# Altium PCB PID _v2.PcbDoc
Units mil, origin at the board's own origin, x right, y up, seen from the top; angles counter-clockwise.
Board outline 3937.01 x 3937.01 mil, 2 copper layers (Top Layer, Bottom Layer); 59 components, 49 nets, 208 pads, 4 vias.
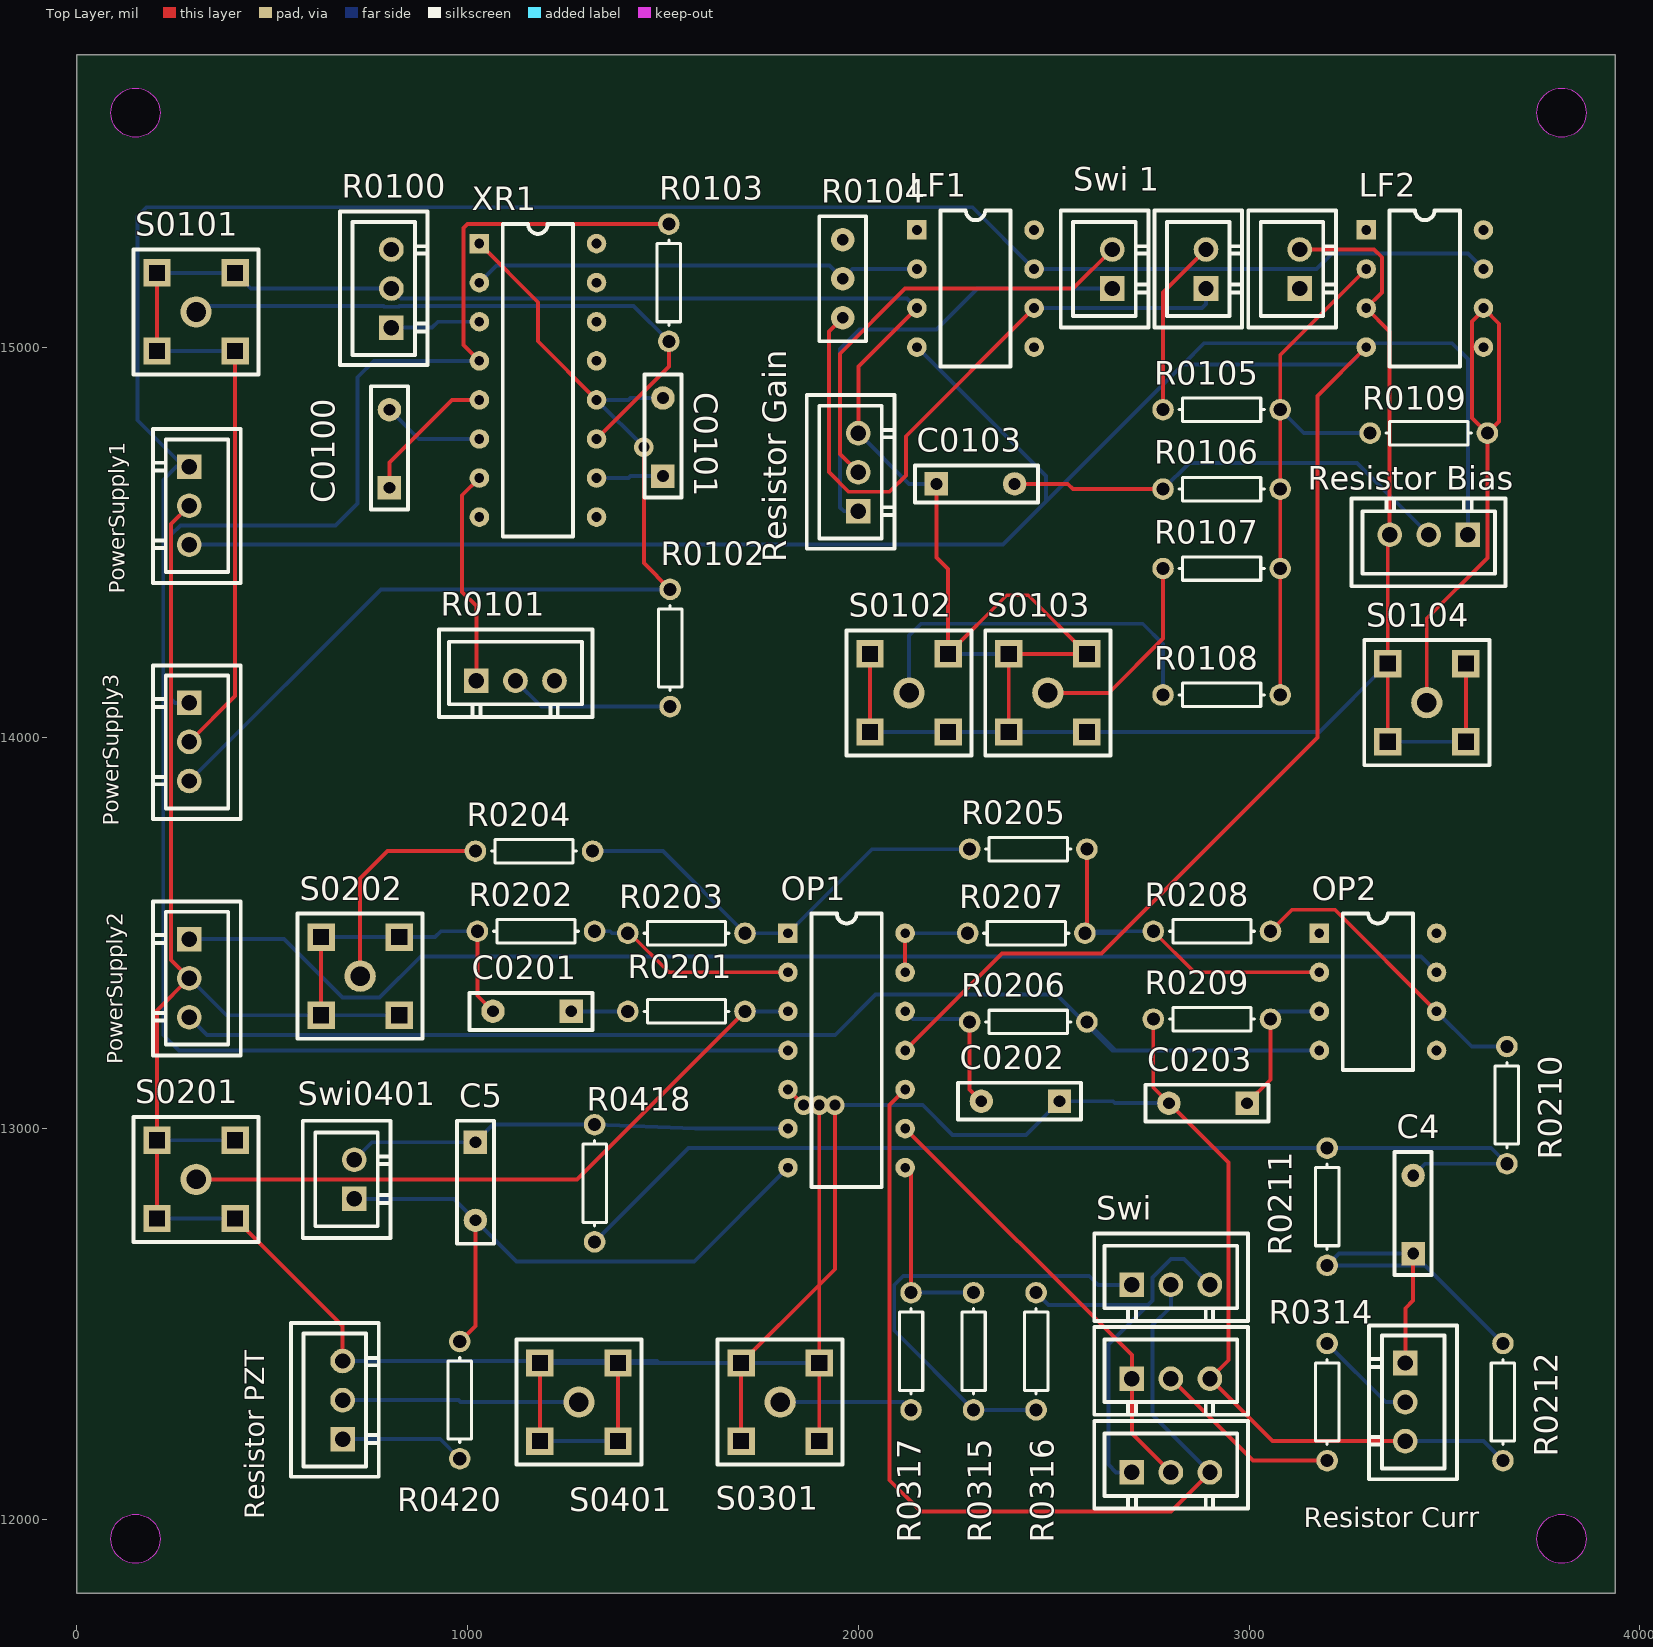
[diagram p0: Top Layer view]
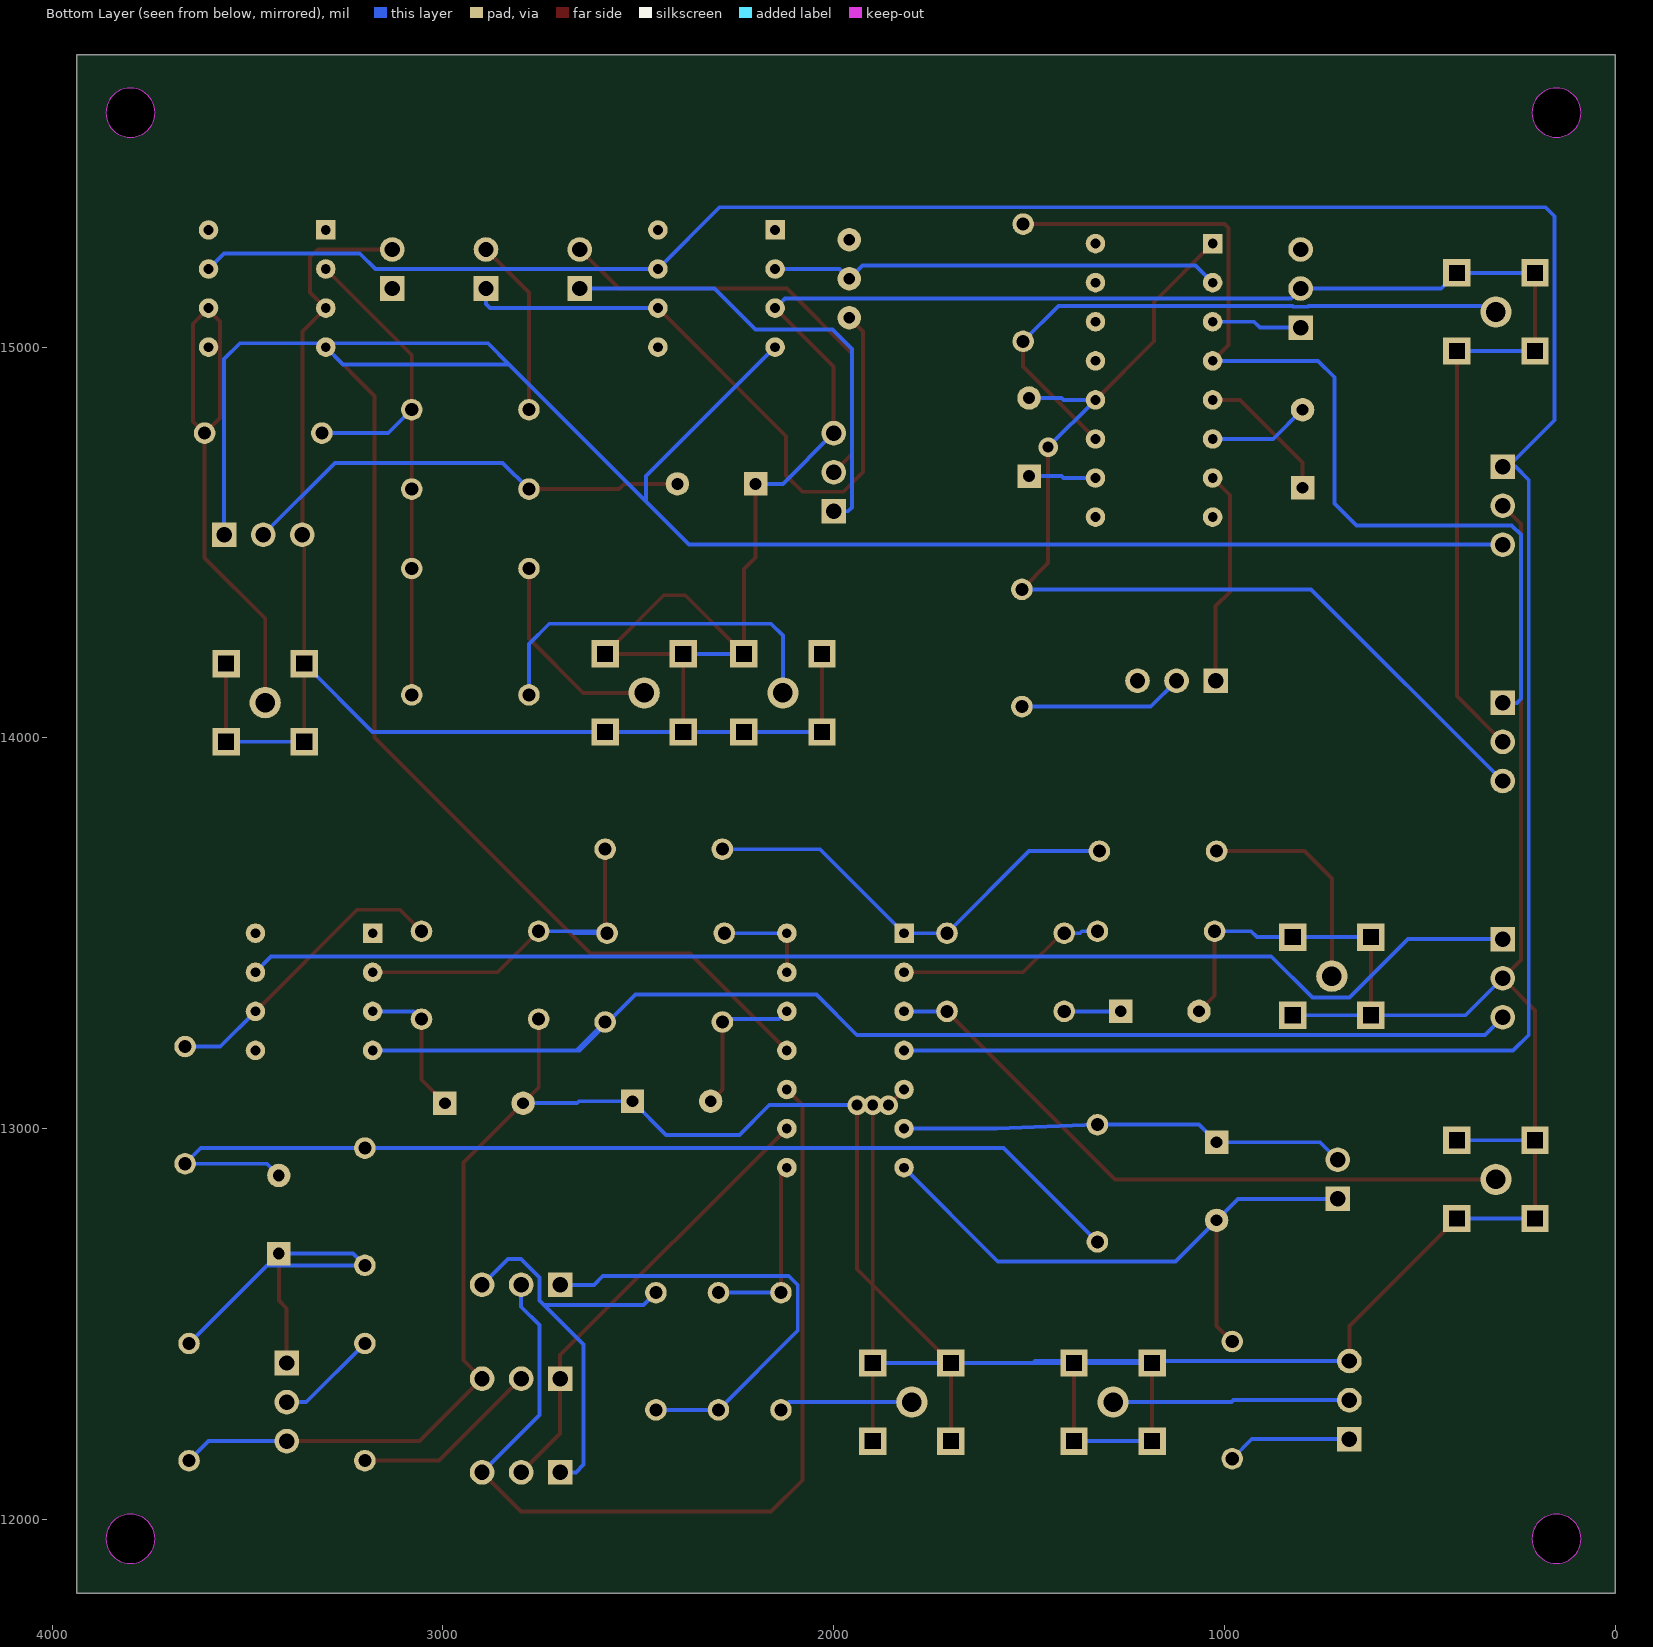
[diagram p1: Bottom Layer view, seen from below]

## Layer stack, top to bottom
Top Solder: solder mask 0.4, Solder Resist, Dk 3.5
Top Layer: signal copper 1.4
Dielectric 1: dielectric 12.6, FR-4, Dk 4.8
Bottom Layer: signal copper 1.4
Bottom Solder: solder mask 0.4, Solder Resist, Dk 3.5

## Board outline
0,11811.02 3937.01,11811.02 3937.01,15748.03 0,15748.03
cut-out: 3800,11887.01 cw(c3800,11950) 3737.01,11950 cw(c3800,11950) 3800,12012.99 cw(c3800,11950) 3862.99,11950 cw(c3800,11950)
cut-out: 150,11887.01 cw(c150,11950) 87.01,11950 cw(c150,11950) 150,12012.99 cw(c150,11950) 212.99,11950 cw(c150,11950)
cut-out: 3800,15537.01 cw(c3800,15600) 3737.01,15600 cw(c3800,15600) 3800,15662.99 cw(c3800,15600) 3862.99,15600 cw(c3800,15600)
cut-out: 150,15537.01 cw(c150,15600) 87.01,15600 cw(c150,15600) 150,15662.99 cw(c150,15600) 212.99,15600 cw(c150,15600)

## Design rules (kind name [scope] priority, off if disabled: settings)
Clearance [All] p1: gap=10 ignorepadtopadclearanceinfootprint=FALSE
PolygonConnect [All] p1: thpad.connectstyle=Relief thpad.reliefconductorwidth=10 thpad.reliefentries=4 thpad.polygonreliefangle="90 Angle" thpad.airgapwidth=10 smdpad.connectstyle=Direct smdpad.reliefconductorwidth=10 smdpad.reliefentries=4 smdpad.polygonreliefangle="90 Angle" smdpad.airgapwidth=10 via.connectstyle=Direct via.reliefconductorwidth=10 via.reliefentries=4 via.polygonreliefangle="90 Angle" via.airgapwidth=10
RoutingVias [All] p1: holewidth=28 width=50 viastyle="Through Hole" minholewidth=28 minwidth=50 maxholewidth=28 maxwidth=50
SolderMaskExpansion [All] p1: expansion=4
Width [All] p1: maxlimit=10 minlimit=10 preferedwidth=10
30 further rules are at their usual default settings.

## Components (designator, comment, footprint, x,y, rotation, side; value= is the part's Value field where it differs from the comment)
C4 "1uF" Capacitor 3420,12680 r90 top
C5 "1uF" Capacitor 1020,12965 r270 top
C0100 "1uF" Capacitor 800,14640 r90 top
C0101 "1uF" Capacitor 1500,14670 r90 top
C0103 "1uF" Capacitor 2200,14650 r0 top
C0201 "1uF" Capacitor 1265,13300 r180 top
C0202 "1uF" Capacitor 2515,13070 r180 top
C0203 "1uF" Capacitor 2995,13065 r180 top
LF1 "LF356N" DIP8 2150,15300 r0 top
LF2 "LF356N" DIP8 3300,15300 r0 top
OP1 "OP467" DIP14 1820,13500 r0 top
OP2 "OPA847" DIP8 3180,13500 r0 top
PowerSupply1 "J-3" J3 287.51,14694.15 r270 top
PowerSupply2 "J-3" J3 287.51,13485 r270 top
PowerSupply3 "J-3" J3 287.51,14089.58 r270 top
R0100 "1K" J3 804.99,15050 r90 top
R0101 "1K" J3 1022.48,14145.95 r0 top
R0102 "Res1" AXIAL-0.3 1518.31,14230 r90 top value=1K
R0103 "Res1" AXIAL-0.3 1515,15165 r90 top value=10k
R0104 "1K" "Res Adj 2" 1960,15075 r90 top
R0105 "Res1" AXIAL-0.3 2930,14840 r0 top value=10K
R0106 "Res1" AXIAL-0.3 2930,14636.67 r0 top value=10K
R0107 "Res1" AXIAL-0.3 2930,14433.33 r0 top value=10K
R0108 "Res1" AXIAL-0.3 2930,14110 r0 top value=10K
R0109 "Res1" AXIAL-0.3 3460,14780 r0 top value=10K
R0201 "Res1" AXIAL-0.3 1560,13300 r180 top value=150
R0202 "Res1" AXIAL-0.3 1175,13505 r180 top value=3k
R0203 "Res1" AXIAL-0.3 1560,13500 r0 top value=3k
R0204 "Res1" AXIAL-0.3 1170,13710 r0 top value=560
R0205 "Res1" AXIAL-0.3 2435,13715 r0 top value=560
R0206 "Res1" AXIAL-0.3 2435,13272.8 r180 top value=100k
R0207 "Res1" AXIAL-0.3 2430,13500 r0 top value=560
R0208 "Res1" AXIAL-0.3 2905,13505 r0 top value=5k
R0209 "Res1" AXIAL-0.3 2905,13280 r0 top value=560
R0210 "Res1" AXIAL-0.3 3660,13060 r270 top value=51
R0211 "Res1" AXIAL-0.3 3200,12800 r270 top value=1.5k
R0212 "Res1" AXIAL-0.3 3650,12300 r270 top value=300
R0314 "Res1" AXIAL-0.3 3200,12300 r90 top value=10k
R0315 "Res1" AXIAL-0.3 2295,12430 r90 top value=10k
R0316 "Res1" AXIAL-0.3 2455,12430 r270 top value=10k
R0317 "Res1" AXIAL-0.3 2135,12430 r90 top value=51
R0418 "Res1" AXIAL-0.3 1325,12860 r90 top value=100k
R0420 "Res1" AXIAL-0.3 980,12305 r90 top value=20k
"Resistor Bias" "J-3" J3 3560,14520 r180 top
"Resistor Curr" "J-3" J3 3400,12400 r270 top
"Resistor Gain" "J-3" J3 2000,14580 r90 top
"Resistor PZT" "J-3" J3 679.99,12205 r90 top
S0101 "Square Wave Out" SMA-S 205,15190 r0 top
S0102 "Error Signal" SMA-S 2030,14215 r0 top
S0103 "Mod in" SMA-S 2385,14215 r0 top
S0104 "Current / PZT Out" SMA-S 3355,14190 r0 top
S0201 "Input 4002" SMA-S 205,12970 r0 top
S0202 "Error Signal Monitor" SMA-S 625,13490 r0 top
S0301 "Current Out" SMA-S 1700,12400 r0 top
S0401 "PZT Out" SMA-S 1185,12400 r0 top
Swi "Switch 3x2" "SWI 3X2" 2700.79,12361.9 r0 top
Swi0401 "PZT Switch" J2 710,12820 r90 top
"Swi 1" "Switch 2x2" "SWI 2X2" 2890,15150 r90 top
XR1 "XR-2206" DIP16 1030,15265 r0 top

## Footprints (in the part's own frame and the unit in brackets; to place one, negate y for a bottom-side part, rotate by r counter-clockwise, add the part's x,y. Pads: shape width x height; smd on the part's side, far side on the other; paste and mask are expansions set on the pad)
AXIAL-0.3 [mm] "Axial Device, Thru-Hole; 2 Leads; 0.3 in Pin Spacing"
  round 1.4 hole 0.85: 1(-3.81,0) 2(3.81,0)
  silkscreen extent -2.77,-0.76 2.77,0.76
Capacitor [mil]
  rect 60x60 hole 30: 1(0,0)
  round 60 hole 30: 2(200,0)
  silkscreen extent -55,-47 260,47
DIP8 [mil]
  rect 50x50 hole 25: 1(0,0)
  round 50 hole 25: 2(0,-100) 3(0,-200) 4(0,-300) 5(300,-300) 6(300,-200) 7(300,-100) 8(300,0)
  silkscreen extent 60,-350 240,50
DIP14 [mil]
  rect 50x50 hole 25: 1(0,0)
  round 50 hole 25: 2(0,-100) 3(0,-200) 4(0,-300) 5(0,-400) 6(0,-500) 7(0,-600) 8(300,-600) 9(300,-500) 10(300,-400) 11(300,-300) 12(300,-200) 13(300,-100) 14(300,0)
  silkscreen extent 60,-650 240,50
DIP16 [mil]
  rect 50x50 hole 25: 1(0,0)
  round 50 hole 25: 2(0,-100) 3(0,-200) 4(0,-300) 5(0,-400) 6(0,-500) 7(0,-600) 8(0,-700) 9(300,-700) 10(300,-600) 11(300,-500) 12(300,-400) 13(300,-300) 14(300,-200) 15(300,-100) 16(300,0)
  silkscreen extent 60,-750 240,50
J2 [mm] "J1-3"
  rect 1.6x1.6 hole 1: 1(0,0)
  round 1.6 hole 1: 2(2.54,0)
  silkscreen extent -2.54,-2.35 5.08,3.35
J3 [mm] "+-G"
  rect 1.6x1.6 hole 1: 1(0,0)
  round 1.6 hole 1: 2(2.54,0) 3(5.08,0)
  silkscreen extent -2.44,-2.35 7.56,3.35
"Res Adj 2" [mil]
  round 60 hole 30: 1(0,0) 1(0,0) 2(100,0) 3(200,0)
  silkscreen extent -60,-60 260,60
SMA-S [mil]
  round 80 hole 50: 1(100,-100)
  rect 70x70 hole 40 square: 2(0,-200) 2(0,0) 2(200,-200) 2(200,0)
  silkscreen extent -60,-260 260,60
"SWI 2X2" [mm]
  rect 1.6x1.6 hole 1: 1(0,0) 3(0,6.096) 5(0,-6.096)
  round 1.6 hole 1: 2(2.54,0) 4(2.54,6.096) 6(2.54,-6.096)
  silkscreen extent -2.54,-8.45 5.08,9.45
"SWI 3X2" [mm]
  rect 1.6x1.6 hole 1: 1(-0.02,-0.048) 4(-0.02,6.048) 5(-0.02,-6.144)
  round 1.6 hole 1: 2(2.52,-0.048) 3(5.06,-0.048) 6(2.52,6.048) 7(2.52,-6.144) 8(5.06,6.048) 9(5.06,-6.144)
  silkscreen extent -2.46,-8.49 7.54,9.4

## Part data
C4 C5 C0100 C0101 C0103 C0201 C0202 C0203: library part Cap
R0100 R0101 R0104: library part "Res Adj"
R0102 R0103 R0105 R0106 R0107 R0108 R0109 R0201 R0202 R0203 R0204 R0205 R0206 R0207 R0208 R0209 R0210 R0211 R0212 R0314 R0315 R0316 R0317 R0418 R0420: "Resistor", LatestRevisionDate=17-Jul-2002, LatestRevisionNote="Re-released for DXP Platform.", PackageDescription="Axial Device, Thru-Hole; 2 Leads; 0.3 in Pin Spacing", PackageReference=AXIAL-0.3, Published=8-Jun-2000, Publisher="Altium Limited"
S0101 S0102 S0103 S0104 S0201 S0202 S0301 S0401: library part SMA-S
Swi0401: library part "Switch 1x1"

## Via types
v1: diameter 50, hole 28, Top Layer to Bottom Layer, 4 vias

## Nets (pads, with @x,y where several pads share a name; then routed paths per layer and width w, separated by ;. In a path a pad name is that pad's centre, name@x,y a point inside that pad or via, vN(x,y) a via of type N, cw(c..) or ccw(c..) an arc to the next point about the centre after c; other vN are vias at no path point)
GND: "Resistor Curr.3" "Resistor PZT.3" C0201.2 C0202.1 C0203.2 OP1.5 PowerSupply1.2 PowerSupply2.2 R0202.2 R0209.1 R0212.2 S0201.2 S0202.2 S0301.2 S0401.2 Swi.3 | length 11043.6
  Top Layer w10: S0201.2@205,12770 205,12970 205,13302.5 PowerSupply2.2 241,13431.5 241,14547.65 PowerSupply1.2 ; S0201.2@405,12770 680,12495 680,12405 ; S0202.2@625,13290 S0202.2@625,13490 ; R0202.2 1025,13340 C0201.2 ; S0401.2@1185,12200 S0401.2@1185,12400 ; S0401.2@1385,12200 S0401.2@1385,12400 ; S0301.2@1700,12200 1700,12400 1900,12600 ; OP1.5 v1(1860,13060) ; S0301.2@1900,12200 1900,12400 1900,12600 ; v1(1900,13060) 1900,12600 ; v1(1940,13060) 1940,12640 1900,12600 ; R0209.1 2755,13105 C0203.2 2947,12913 2947,12407 Swi.3 3060,12200 3399.99,12200
  Bottom Layer w10: S0201.2@205,12770 S0201.2@405,12770 ; S0201.2@205,12970 S0201.2@405,12970 ; PowerSupply2.2 382.5,13290 625,13290 S0202.2@825,13290 ; S0202.2@625,13490 825,13490 917,13490 932,13505 R0202.2 ; 680,12405 1485,12405 1490,12400 ; S0401.2@1185,12200 S0401.2@1385,12200 ; S0401.2@1185,12400 1385,12400 1490,12400 ; v1(1860,13060) v1(1900,13060) v1(1940,13060) 2165,13060 2241,12984 2429,12984 C0202.1 2652,13070 2657,13065 C0203.2 ; S0301.2@1900,12400 1700,12400 1490,12400 ; 3399.99,12200 3600,12200 R0212.2
NetC4_1: "Resistor Curr.1" C4.1 R0211.2 R0212.1 | length 1053.6
  Top Layer w10: 3400,12400 3400,12540 3420,12560 C4.1
  Bottom Layer w10: C4.1 3230,12680 R0211.2 3450,12650 R0212.1
NetC4_2: C4.2 R0210.2 R0211.1 R0418.1 | length 2703.4
  Bottom Layer w10: R0418.1 1565,12950 R0211.1 3620,12950 R0210.2 3450,12910 C4.2
NetC5_1: C5.1 OP1.6 R0418.2 Swi0401.2 | length 1147.5
  Bottom Layer w10: Swi0401.2 755.01,12965 C5.1 1065,13010 R0418.2 1583,13000 OP1.6
NetC5_2: C5.2 OP1.7 R0420.2 Swi0401.1 | length 1602.3
  Top Layer w10: R0420.2 1020,12495 C5.2
  Bottom Layer w10: Swi0401.1 965,12820 C5.2 1125,12660 1580,12660 OP1.7
NetC0100_1: C0100.1 XR1.5 | length 361.3
  Top Layer w10: C0100.1 800,14705 960,14865 XR1.5
NetC0100_2: C0100.2 XR1.6 | length 261.1
  Bottom Layer w10: C0100.2 875,14765 XR1.6
NetC0101_1: C0101.1 XR1.10 | length 172.1
  Bottom Layer w10: XR1.10 1412,14665 1417,14670 C0101.1
NetC0101_2: C0101.2 PowerSupply3.3 R0102.2 XR1.1 XR1.12 | length 2693.3
  Top Layer w10: XR1.1 1180,15115 1180,15015 XR1.12 ; v1(1451,14744) 1451,14447.31 R0102.2
  Bottom Layer w10: PowerSupply3.3 777.92,14380 R0102.2 ; v1(1451,14744) XR1.12 1412,14865 1417,14870 C0101.2
NetC0103_1: "Resistor Bias.3" "Resistor Gain.3" "Swi 1.6" C0103.1 LF1.3 LF2.3 PowerSupply3.2 R0100.2 S0101.2 S0102.2 S0103.2 S0104.2 | length 9048.3
  Top Layer w10: S0101.2@205,14990 S0101.2@205,15190 ; PowerSupply3.2 405,14107.08 S0101.2@405,14990 ; 2000.01,14780 2000.01,14950.01 LF1.3 ; S0102.2@2030,14015 S0102.2@2030,14215 ; C0103.1 2200,14462 2230,14432 2230,14215 2380,14365 2435,14365 2585,14215 2385,14215 S0103.2@2385,14015 ; 3130.01,15250 3320,15250 3340,15230 3340,15140 LF2.3 3360,15040 3360,14520.01 3355,14515.01 3355,14190 S0104.2@3355,13990 ; S0104.2@3555,13990 S0104.2@3555,14190
  Bottom Layer w10: S0101.2@205,14990 S0101.2@405,14990 ; S0101.2@205,15190 405,15190 445,15150 R0100.2 830,15125 2125,15125 LF1.3 ; 2000.01,14780 2130.01,14650 C0103.1 ; S0102.2@2030,14015 2230,14015 2385,14015 2585,14015 3180,14015 S0104.2@3355,14190 ; S0102.2@2230,14215 S0103.2@2385,14215 ; S0104.2@3355,13990 S0104.2@3555,13990
NetC0103_2: "Resistor Bias.2" C0103.2 R0106.1 | length 1169.6
  Top Layer w10: C0103.2 2536,14650 2549.33,14636.67 R0106.1
  Bottom Layer w10: R0106.1 2847.33,14704 3276.01,14704 3460,14520.01
NetC0201_1: C0201.1 R0201.2 | length 145
  Bottom Layer w10: C0201.1 R0201.2
NetC0202_2: C0202.2 OP1.12 R0206.2 | length 395.7
  Top Layer w10: R0206.2@2285,13280 R0206.2 2285,13100 C0202.2
  Bottom Layer w10: OP1.12 2140,13280 R0206.2@2285,13280
NetC0203_1: C0203.1 OP2.3 R0209.2 | length 373.1
  Top Layer w10: C0203.1 3055,13125 R0209.2
  Bottom Layer w10: R0209.2 3075,13300 OP2.3
NetLF1_2: LF1.2 R0104.2 XR1.2 | length 1162.7
  Bottom Layer w10: XR1.2 1074,15209 1926,15209 R0104.2 1985,15200 LF1.2
NetLF1_4: "Resistor Bias.1" LF1.4 LF2.4 OP1.11 PowerSupply1.3 | length 7409.2
  Top Layer w10: OP1.11 2368,13448 2622,13448 3175,14001 3175,14875 LF2.4
  Bottom Layer w10: PowerSupply1.3 288.35,14495 2370,14495 2480,14605 ; LF1.4 2480,14670 2480,14605 ; LF2.4 3256,14956 2831,14956 ; 3560,14520 3560,14970 3520,15010 2885,15010 2831,14956 ; 2480,14605 2831,14956
NetLF1_6: "Swi 1.1" LF1.6 R0104.1 | length 1692.6
  Top Layer w10: R0104.1@1960,15075 1925,15040 1925,14680 1975,14630 2080,14630 2122,14672 2122,14772 LF1.6
  Bottom Layer w10: LF1.6 2880,15100 2890,15110 2890,15150
NetLF1_7: LF1.7 LF2.7 OP1.4 PowerSupply1.1 | length 7374.7
  Bottom Layer w10: OP1.4 261,13200 221,13240 221,14660 255.15,14694.15 PowerSupply1.1 287.51,14697 271,14697 155,14813 155,15335 178,15358 2292,15358 LF1.7 3173,15200 3213,15240 3560,15240 LF2.7
NetLF2_2: LF2.2 R0105.2 R0106.2 R0107.2 R0108.2 R0109.1 | length 1436
  Top Layer w10: R0108.2 R0107.2 R0106.2 R0105.2 3080,14980 LF2.2
  Bottom Layer w10: R0105.2 3140,14780 R0109.1
NetLF2_6: LF2.6 R0109.2 S0104.1 | length 1449.9
  Top Layer w10: S0104.1 3455,14305 3610,14460 R0109.2 ; LF2.6 LF2.6@3602.5,15097.5 ; LF2.6@3602.5,15097.5 3640,15060 3640,14810 R0109.2 ; LF2.6@3602.5,15097.5 3571,15066 3571,14819 R0109.2
NetOP1_1: OP1.1 R0203.2 R0204.2 R0205.1 | length 1141
  Bottom Layer w10: R0204.2 1500,13710 R0203.2 OP1.1 2035,13715 R0205.1
NetOP1_2: OP1.2 R0202.1 R0203.1 | length 545.6
  Top Layer w10: R0203.1@1410,13505 1412.5,13502.5 1515,13400 OP1.2
  Bottom Layer w10: R0202.1 1365,13505 1370,13500 R0203.1 R0203.1@1410,13505
NetOP1_3: OP1.3 R0201.1 S0201.1 | length 1693.1
  Top Layer w10: S0201.1 1280,12870 R0201.1
  Bottom Layer w10: R0201.1 OP1.3
NetOP1_8: OP1.8 R0315.2 R0317.2 | length 486.2
  Top Layer w10: OP1.8 2135,12885 R0317.2
  Bottom Layer w10: R0317.2 R0315.2
NetOP1_9: OP1.9 Swi.1 Swi.7 | length 1161.7
  Top Layer w10: OP1.9 2700,12420 Swi.1 2700,12220 Swi.7
NetOP1_10: OP1.10 Swi.6 Swi.9 | length 2471.5
  Top Layer w10: OP1.10 2080,13060 2080,12100 2160,12020 2800,12020 Swi.9
  Bottom Layer w10: Swi.6 2800,12544 2753,12497 2753,12267 Swi.9
NetOP1_13: OP1.13 OP1.14 R0207.1 | length 260
  Top Layer w10: OP1.13 OP1.14
  Bottom Layer w10: OP1.14 R0207.1
NetOP2_2: OP2.2 R0205.2 R0207.2 R0208.1 | length 940.6
  Top Layer w10: R0207.2@2585,13505 R0205.2 ; R0208.1 2860,13400 OP2.2
  Bottom Layer w10: R0207.2 2665,13500 2670,13505 ; R0207.2@2585,13505 2670,13505 ; R0208.1 2670,13505
NetOP2_4: OP2.4 PowerSupply2.3 R0206.1 | length 3116
  Bottom Layer w10: PowerSupply2.3 332.5,13240 1941,13240 2044,13343 2507,13343 2650,13200 2657.8,13200 ; R0206.1 2657.8,13200 ; OP2.4 2657.8,13200
NetOP2_6: OP2.6 R0208.2 R0210.1 | length 772.8
  Top Layer w10: R0208.2 3110,13560 3220,13560 OP2.6
  Bottom Layer w10: OP2.6 3570,13210 R0210.1
NetOP2_7: OP2.7 PowerSupply2.1 | length 3314.7
  Bottom Layer w10: PowerSupply2.1 530,13485 680,13335 775,13335 880,13440 3440,13440 OP2.7
NetPowerSupply3_1: PowerSupply3.1 R0103.2 XR1.4 | length 2519.1
  Top Layer w10: XR1.4 990,15005 990,15305 1000,15315 R0103.2
  Bottom Layer w10: PowerSupply3.1 251.42,14089.58 241,14100 241,14520 265,14544 662,14544 718,14600 718,14923 760,14965 XR1.4
NetR0100_1: R0100.1 XR1.3 | length 231.2
  Bottom Layer w10: R0100.1 909,15050 924,15065 XR1.3
NetR0101_1: R0101.1 XR1.7 | length 552.4
  Top Layer w10: R0101.1 1022.48,14337 986,14373.48 986,14621 XR1.7
NetR0101_2: R0101.2 R0102.1 | length 423.1
  Bottom Layer w10: R0101.2 1188.42,14080 R0102.1
NetR0103_1: R0103.1 S0101.1 XR1.11 | length 1581.4
  Top Layer w10: XR1.11 1515,14950 R0103.1
  Bottom Layer w10: S0101.1 320,15105 784.24,15105 785.74,15103.5 824.26,15103.5 825.76,15105 1425,15105 R0103.1
NetR0105_1: "Swi 1.2" R0105.1 | length 455.6
  Top Layer w10: R0105.1 2780,15139.99 2890.01,15250
NetR0107_1: R0107.1 S0103.1 | length 531.9
  Top Layer w10: S0103.1 2641,14115 2780,14254 R0107.1
NetR0108_1: R0108.1 S0102.1 | length 961
  Bottom Layer w10: S0102.1 2130,14262 2160,14292 2728,14292 2780,14240 R0108.1
NetR0204_1: R0204.1 S0202.1 | length 574
  Top Layer w10: S0202.1 725,13640 795,13710 R0204.1
NetR0314_1: R0314.1 Swi.2 | length 487
  Top Layer w10: Swi.2 3010,12150 R0314.1
NetR0314_2: "Resistor Curr.2" R0314.2 | length 262.1
  Bottom Layer w10: R0314.2 3350,12300 3399.99,12300
NetR0315_1: R0315.1 R0316.2 Swi.4 | length 1191.1
  Bottom Layer w10: R0316.2 R0315.1 2092,12483 2092,12600 2115,12623 2591.01,12623 2614,12600.01 Swi.4
NetR0316_1: R0316.1 Swi.5 Swi.8 | length 1087.1
  Bottom Layer w10: R0316.1 2487,12548 2741,12548 ; Swi.5 2660,12120.01 2640,12140.01 2640,12447 2741,12548 ; Swi.8 2834,12666 2800,12666 2753,12619 2753,12560 2741,12548
NetR0317_1: R0317.1 S0301.1 | length 343.3
  Bottom Layer w10: S0301.1 2115,12300 R0317.1
NetR0420_1: "Resistor PZT.1" R0420.1 | length 320.7
  Bottom Layer w10: 679.99,12205 930,12205 R0420.1
"NetResistor Gain_1": "Resistor Gain.1" "Swi 1.3" | length 1217.3
  Bottom Layer w10: 2000,14580 1963,14580 1953,14590 1953,14995 2003,15045 2200,15045 2305,15150 2650,15150
"NetResistor Gain_2": "Resistor Gain.2" "Swi 1.4" | length 1130.1
  Top Layer w10: 2000.01,14680 1953,14727.01 1953,14983 2120,15150 2550.01,15150 2650.01,15250
"NetResistor PZT_2": "Resistor PZT.2" S0401.1 | length 607.1
  Bottom Layer w10: 680,12305 977,12305 982,12300 S0401.1
pads on no net: "Swi 1.5" LF1.1 LF1.5 LF1.8 LF2.1 LF2.5 LF2.8 OP2.1 OP2.5 OP2.8 R0100.3 R0101.3 R0104.3 XR1.8 XR1.9 XR1.13 XR1.14 XR1.15 XR1.16

## Silkscreen, mask and mechanical layers (free items; w line width, h text height)
Drill Drawing:
  lines w10: 2060,7005 2100,7045 ; 3937.01,11811.02 0,11811.02 0,15748.03 3937.01,15748.03 ; 6960,5000 7020,4940
  text "Sweep Frequency and PID for Phase Lock V2. Zuo Ying" at 400,15600 h60